# Altium PCB Motor-42-Test.PcbDoc
Units mm, origin at the board's own origin, x right, y up, seen from the top; angles counter-clockwise.
Board outline 42 x 42 mm, 2 copper layers (Top Layer, Bottom Layer); 33 components, 20 nets, 186 pads, 95 vias.
Unrouted connection lines stored in the file: 33.
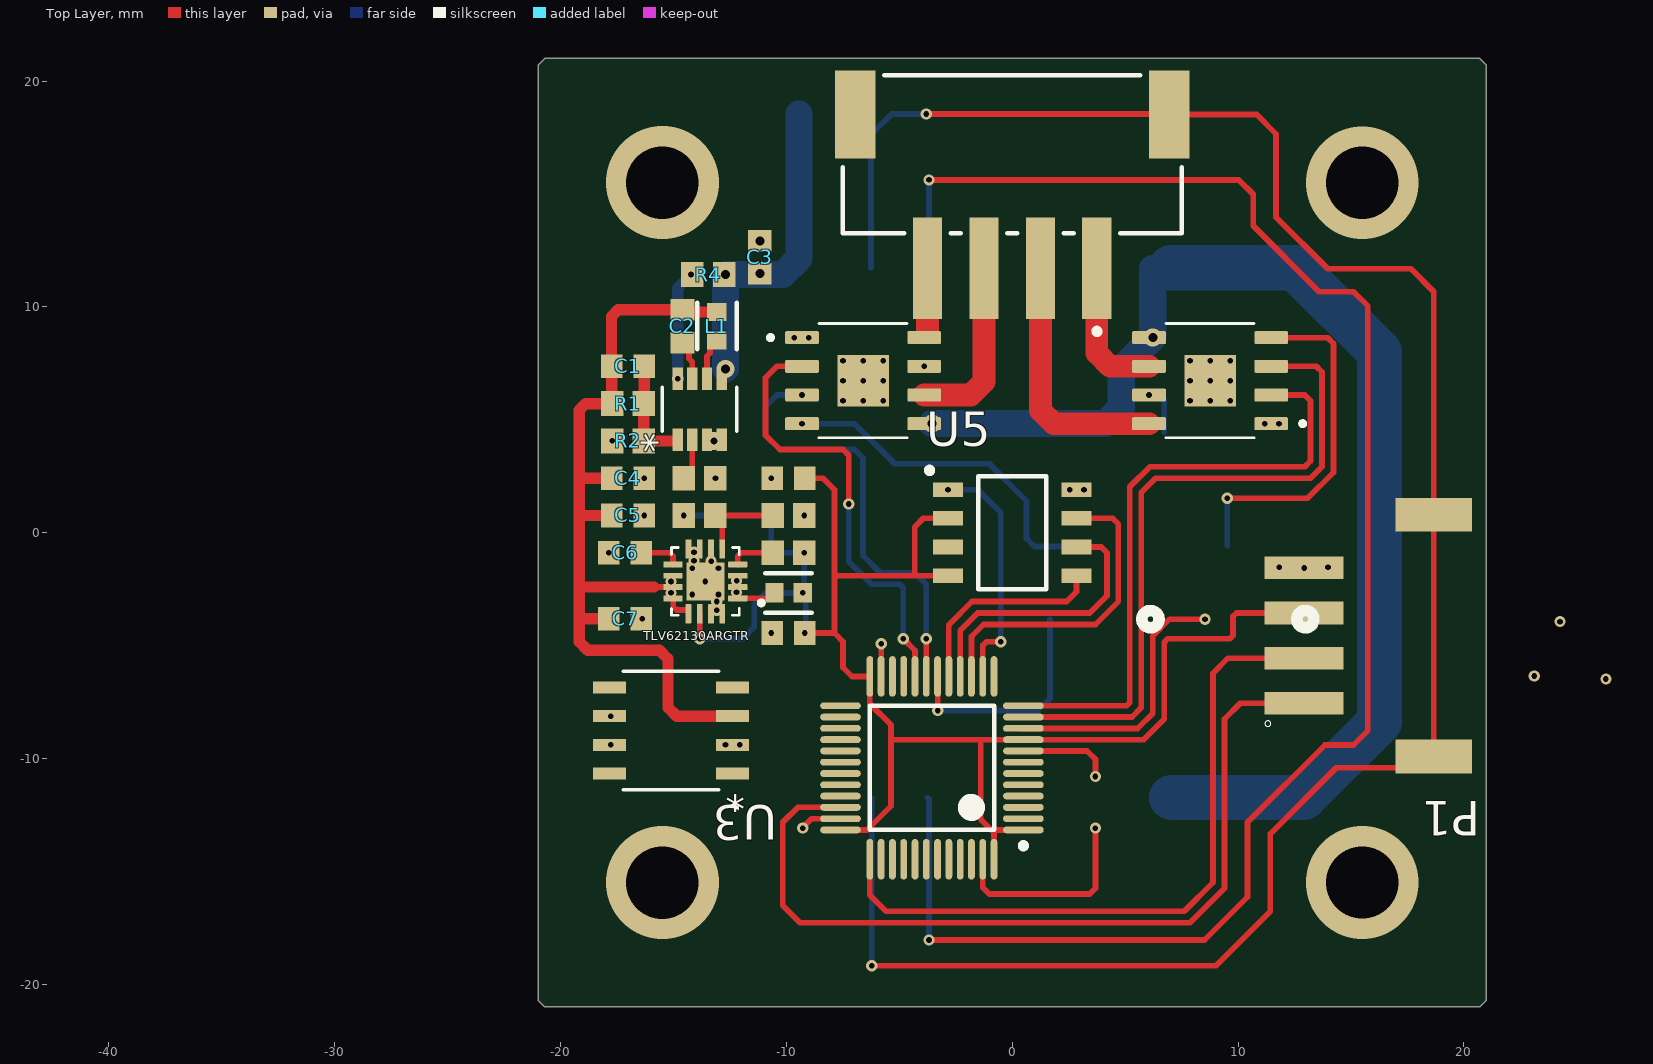
[diagram p0: Top Layer view]
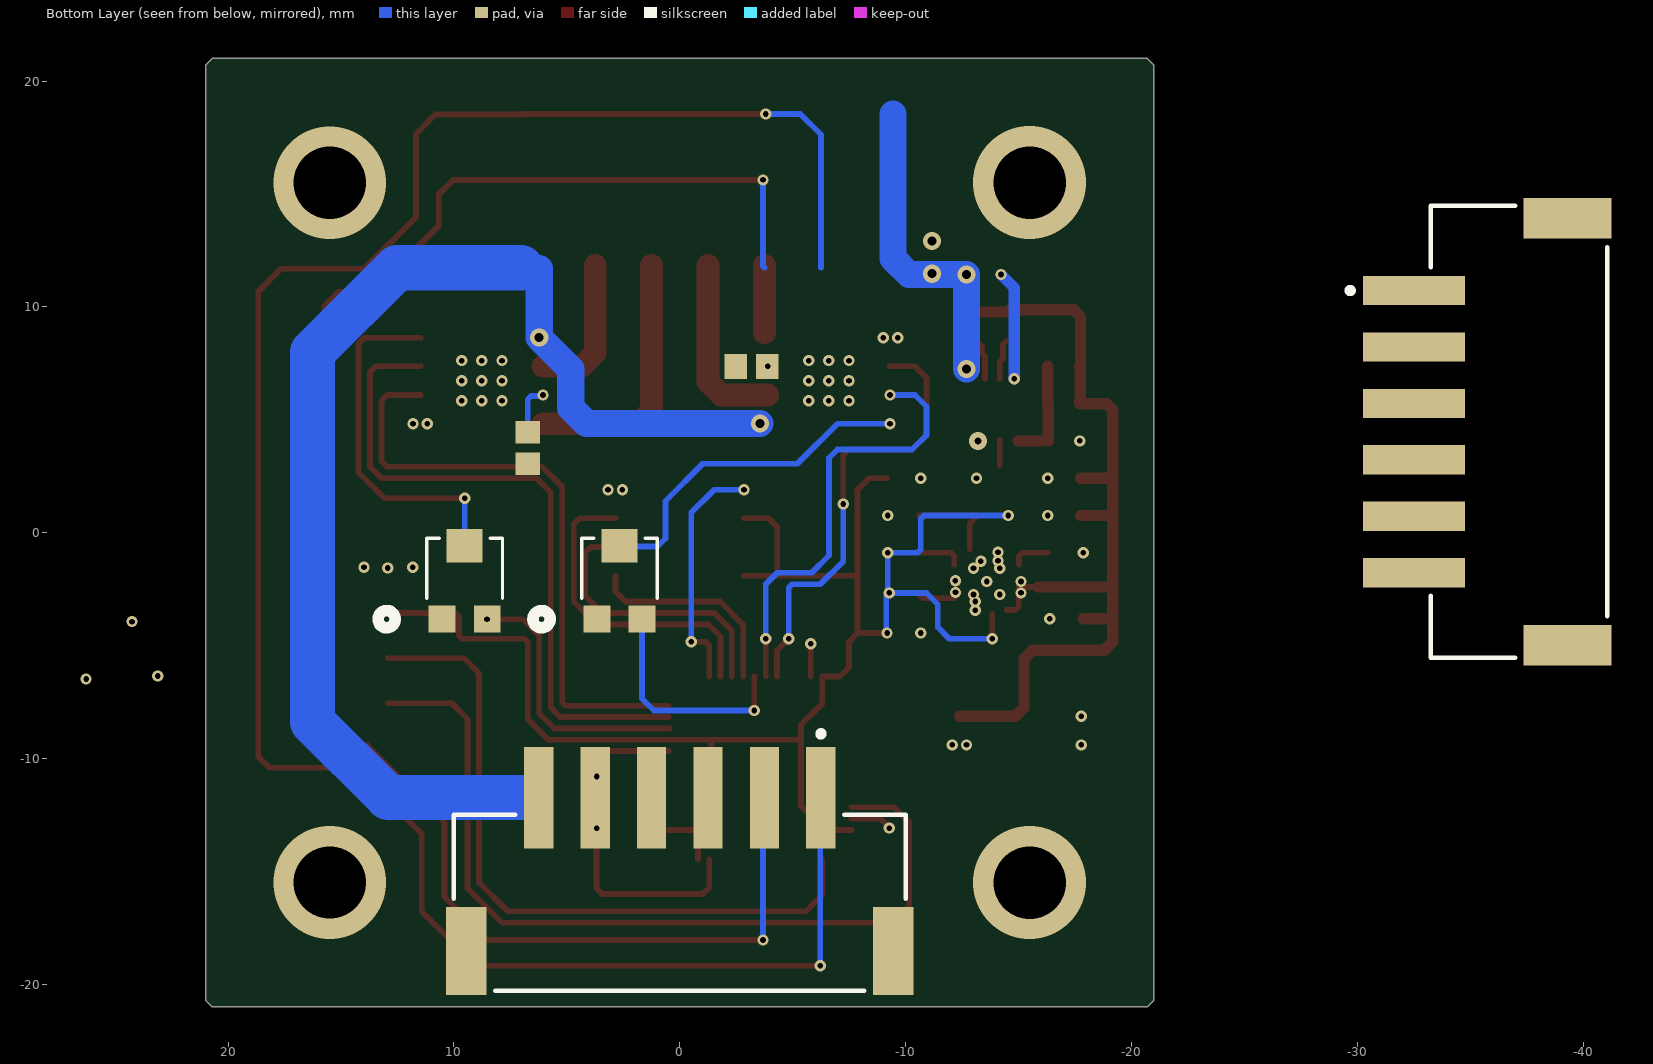
[diagram p1: Bottom Layer view, seen from below]

## Layer stack, top to bottom
Top Solder: solder mask 0.0102, Solder Resist, Dk 3.5
Top Layer: signal copper 0.0356
Dielectric 1: dielectric 0.32, FR-4, Dk 4.8
Bottom Layer: signal copper 0.0356
Bottom Solder: solder mask 0.0102, Solder Resist, Dk 3.5

## Board outline
-21,-20.701 -20.701,-21 20.701,-21 21,-20.701 21,20.701 20.701,21 -20.701,21 -21,20.701

## Design rules (kind name [scope] priority, off if disabled: settings)
Clearance [All] p1: gap=0.1 ignorepadtopadclearanceinfootprint=TRUE
Clearance Clearance_net [InNetClass('All Nets') vs InNetClass('All Nets')] p2: gap=0.01 ignorepadtopadclearanceinfootprint=FALSE
PolygonConnect [All] p1: connectstyle=Relief reliefconductorwidth=0.254 reliefentries=4 polygonreliefangle="90 Angle" airgapwidth=0.254
RoutingVias [All] p1: holewidth=0.711 width=1.27 viastyle="Through Hole" minholewidth=0.1 minwidth=0.1 maxholewidth=5 maxwidth=5
SolderMaskExpansion [All] p1: expansion=0.102 istentingtop=FALSE
Width [All] p1: maxlimit=3 minlimit=0.254 preferedwidth=0.254
30 further rules are at their usual default settings.

## Classes and differential pairs
component class Motor-42-ClosedLoop: C1 C2 C6 P1 R1 R2 R4 U3 U5

## Components (designator, comment, footprint, x,y, rotation, side; value= is the part's Value field where it differs from the comment)
C1 "12pF" CAPC1608X90X35ML10T15 -17.018,7.366 r180 top
C2 "10nF" CAPC1608X90X35ML10T15 -14.605,9.144 r90 top
C3 "100uF" CAPC1608X90X35ML10T15 -11.176,12.192 r270 top
C4 "100uF" CAPC1608X90X35ML10T15 -17.018,2.413 r180 top
C5 "22uF" CAPC1608X90X35ML10T15 -9.906,2.413 r0 top
C5 "22uF" CAPC1608X90X35ML10T15 -9.906,-4.445 r0 top
C5 "10uF" CAPC1608X90X35ML10T15 -17.018,0.762 r180 top (schematic designator C3)
C6 "3.3nF" CAPC1608X90X35ML10T15 -17.145,-0.889 r0 top (schematic designator C4)
C7 "10uF" CAPC1608X90X35ML10T15 -17.145,-3.81 r180 top (schematic designator C3)
L1 "Comment" FP-LQG18HH_00-IPC_C -13.081,9.144 r90 top
P1 "S4B-PH-SM4-TB" JST_S4B-PH-SM4-TB 12.919,-4.556 r270 top
R1 "110K" RESC1608X55X30ML20T20 -17.018,5.715 r180 top
R2 "15K" RESC1608X55X30ML20T20 -17.018,4.064 r0 top
R3 "47K" RESC1608X55X30ML20T20 -13.843,2.413 r180 top
R4 "47K" RESC1608X55X30ML20T20 -13.462,11.43 r0 top
R5 "100K" RESC1608X55X30ML20T20 -9.906,-0.889 r180 top
R6 "750K" RESC1608X55X30ML20T20 -13.843,0.762 r0 top
R7 "240K" RESC1608X55X30ML20T20 -3.175,7.366 r0 bottom
R7 "240K" RESC1608X55X30ML20T20 6.731,3.748 r90 bottom
R7 "240K" RESC1608X55X30ML20T20 -9.906,0.762 r180 top
TLV62130ARGTR "Comment" QFN50P300X300X100-17N -13.589,-2.159 r180 top
U3 "TJA1051T31J" SO8_SOT96-1_NXP -15.113,-8.763 r180 top
U5 "MT6816" SOIC127P600X175-8N-8-V 0,0 r0 top
? "Comment" EVM-3ESX50B14_PAN 2.667,-2.286 r180 bottom
? "Comment" EVM-3ESX50B14_PAN 9.525,-2.286 r180 bottom
? "Comment" FP-S6B-XH-SM4-TB_LF_SN-MFG -37.162,4.472 r90 bottom
? "Comment" FP-S6B-XH-SM4-TB_LF_SN-MFG 0,-16.383 r180 bottom
? "Comment" SOIC127P599X175-9N 8.763,6.731 r180 top
? "Comment" SOIC127P599X175-9N -6.604,6.731 r0 top
? "Comment" FP-LQG18HH_00-IPC_C -9.906,-2.667 r0 top
? "Comment" FP-S4B-XH-SM4-TB_LF_SN-MFG 0,16.764 r180 top
? "Comment" LQFP48_N -3.556,-10.414 r180 top
? "Comment" TSOT_303AIC_SGY -13.843,5.461 r90 top

## Footprints (in the part's own frame and the unit in brackets; to place one, negate y for a bottom-side part, rotate by r counter-clockwise, add the part's x,y. Pads: shape width x height; smd on the part's side, far side on the other; paste and mask are expansions set on the pad)
CAPC1608X90X35ML10T15 [mm] "Chip Capacitor, 2-Leads, Body 1.60x0.80mm, IPC Low Density"
  rect 0.95x1.05 smd: 1(-0.725,0) 2(0.725,0)
  body extent -0.85,-0.45 0.85,0.45, height 0.9
EVM-3ESX50B14_PAN [mil]
  rect 47x47 smd paste+0 mask+0: 1(-39.38,-60.75) 3(39.37,-60.75)
  rect 63x59 smd paste-31.5 mask-31.5: 2(0,67.25)
  silkscreen extent -151,-76 66,80
FP-LQG18HH_00-IPC_C [mm]
  rect 0.806x0.858 smd paste+0 mask+0: 1(-0.626,0) 2(0.626,0)
  silkscreen extent -1.03,-0.87 1.03,0.87, body extent -1.13,-0.58 1.13,0.58, height 0.25
FP-S4B-XH-SM4-TB_LF_SN-MFG [mm]
  rect 1.3x4.5 smd paste+0 mask+0: 1(-3.75,5.05) 2(-1.25,5.05) 3(1.25,5.05) 4(3.75,5.05)
  rect 1.8x3.9 smd paste+0 mask+0: 5(-6.95,-1.75) 6(6.95,-1.75)
  silkscreen extent -7.5,-3.5 7.5,7.97, body extent -7.95,-3.8 7.95,7.4, height 0.25
FP-S6B-XH-SM4-TB_LF_SN-MFG [mm]
  rect 1.3x4.5 smd paste+0 mask+0: 1(6.25,4.65) 2(3.75,4.65) 3(1.25,4.65) 4(-1.25,4.65) 5(-3.75,4.65) 6(-6.25,4.65)
  rect 1.8x3.9 smd paste+0 mask+0: 7(-9.45,-2.15) 8(9.45,-2.15)
  silkscreen extent -10,-3.9 10,7.6, body extent -9.97,-3.9 9.97,6.1, height 6
JST_S4B-PH-SM4-TB [mm]
  rect 1x3.5 smd: 1(3,0) 2(1,0) 3(-1,0) 4(-3,0)
  rect 1.5x3.4 smd: P1(5.35,5.75) P2(-5.35,5.75)
  silkscreen extent 3.77,-1.73 4.03,-1.47
LQFP48_N [mm] "Thin QFP, 48-Leads, Body 7x7mm, Pitch 0.5mm, IPC Medium Density"
  oval 1.8x0.3 smd: 1(-4.05,2.75) 2(-4.05,2.25) 3(-4.05,1.75) 4(-4.05,1.25) 5(-4.05,0.75) 6(-4.05,0.25) 7(-4.05,-0.25) 8(-4.05,-0.75) 9(-4.05,-1.25) 10(-4.05,-1.75) 11(-4.05,-2.25) 12(-4.05,-2.75) 25(4.05,-2.75) 26(4.05,-2.25) 27(4.05,-1.75) 28(4.05,-1.25) 29(4.05,-0.75) 30(4.05,-0.25) 31(4.05,0.25) 32(4.05,0.75) 33(4.05,1.25) 34(4.05,1.75) 35(4.05,2.25) 36(4.05,2.75)
  oval 0.3x1.8 smd: 13(-2.75,-4.05) 14(-2.25,-4.05) 15(-1.75,-4.05) 16(-1.25,-4.05) 17(-0.75,-4.05) 18(-0.25,-4.05) 19(0.25,-4.05) 20(0.75,-4.05) 21(1.25,-4.05) 22(1.75,-4.05) 23(2.25,-4.05) 24(2.75,-4.05) 37(2.75,4.05) 38(2.25,4.05) 39(1.75,4.05) 40(1.25,4.05) 41(0.75,4.05) 42(0.25,4.05) 43(-0.25,4.05) 44(-0.75,4.05) 45(-1.25,4.05) 46(-1.75,4.05) 47(-2.25,4.05) 48(-2.75,4.05)
  silkscreen extent -4.18,-2.75 2.75,3.57, body extent -3.5,-3.5 3.5,3.5, height 1.6
QFN50P300X300X100-17N [mm]
  rrect25% 0.86x0.26 smd: 1(-1.435,0.75) 2(-1.435,0.25) 3(-1.435,-0.25) 4(-1.435,-0.75) 9(1.435,-0.75) 10(1.435,-0.25) 11(1.435,0.25) 12(1.435,0.75)
  rrect25% 0.26x0.86 smd: 5(-0.75,-1.435) 6(-0.25,-1.435) 7(0.25,-1.435) 8(0.75,-1.435) 13(0.75,1.435) 14(0.25,1.435) 15(-0.25,1.435) 16(-0.75,1.435)
  rect 1.68x1.68 smd paste-0.31: 17(0,0)
  round 0.4 hole 0.2 mask+0: 18(0,0) 19(-0.58,0.58) 20(0.58,0.58) 21(-0.58,-0.58) 22(0.58,-0.58)
  silkscreen extent -2.57,-1.5 1.5,1.5, body extent -1.5,-1.5 1.5,1.5, height 1
RESC1608X55X30ML20T20 [mm] "Chip Resistor, 2-Leads, Body 1.60x0.80mm, IPC Low Density"
  rect 1x1.1 smd: 1(-0.7,0) 2(0.7,0)
  body extent -0.9,-0.5 0.9,0.5, height 0.55
SO8_SOT96-1_NXP [mil]
  rect 57.5x21 smd paste+0 mask+0: 1(-107.25,75) 2(-107.25,25) 3(-107.25,-25) 4(-107.25,-75) 5(107.25,-75) 6(107.25,-25) 7(107.25,25) 8(107.25,75)
  silkscreen extent -84,-104 84,104, body extent -122,-99 122,99, height 69
SOIC127P599X175-9N [mm]
  rrect25% 1.5x0.58 smd: 1(-2.705,1.905) 2(-2.705,0.635) 3(-2.705,-0.635) 4(-2.705,-1.905) 5(2.705,-1.905) 6(2.705,-0.635) 7(2.705,0.635) 8(2.705,1.905)
  rect 2.285x2.285 smd paste-2: 9(0,0)
  silkscreen extent -4.2,-2.52 1.95,2.52, body extent -3,-2.45 3,2.45, height 1.75
SOIC127P600X175-8N-8-V [mm]
  rect 1.31x0.65 smd: 1(-2.845,1.905) 2(-2.845,0.635) 3(-2.845,-0.635) 4(-2.845,-1.905) 5(2.845,-1.905) 6(2.845,-0.635) 7(2.845,0.635) 8(2.845,1.905)
  silkscreen extent -3.78,-2.5 1.5,2.88, body extent -3,-2.5 3,2.5, height 1.75
TSOT_303AIC_SGY [mil]
  rect 39.5x18 smd paste+0 mask+0: 1(-53.25,38.39) 2(-53.25,12.8) 3(-53.25,-12.8) 4(-53.25,-38.39) 5(53.25,-38.39) 7(53.25,12.8) 8(53.25,38.39)
  rect 39.5x18 smd paste+0: 6(53.25,-12.8)
  silkscreen extent -39,-65 39,65, body extent -59,-60 59,60, height 43

## Part data
C1 C2 C3 C4 C5 C5 C5 C6 C7: library part CMP-2006-02924-1, Manufacturer=Murata, PART NUMBER=GRM188R71H472KA01D
P1: "Connector Header Surface Mount, Right Angle 4 position 0.079 _2.00mm_", Package=None, Availability=Unavailable, MF="JST Sales", MP=S4B-PH-SM4-TB, Price=None, SnapEDA_Link=https://www.snapeda.com/parts/S4B-PH-SM4-TB/JST%20Sales%20America%20Inc./view-part/473686/?ref=snap
R1 R2 R3 R4 R5 R6 R7 R7 R7: library part CMP-2000-00054-1, Manufacturer=Panasonic, PART NUMBER=ERA3AEB392V
U3: "No Description Available", Mfr_Name=NXP, RefDes=RefDes, Type=Type
U5: library part TLE5012B_E1000, "TLE5012B/TLI5012B Angular and Linear Position Sensor Evaluation Board Automotive", Package="SOIC-8 Infineon Technologies", Availability="In Stock", Check_prices=https://www.snapeda.com/parts/TLE5012B%20E1000/Infineon+Technologies/view-part/?ref=eda, MF="Infineon Technologies", MP="TLE5012B E1000", Price=None, SnapEDA_Link=https://www.snapeda.com/parts/TLE5012B%20E1000/Infineon+Technologies/view-part/?ref=snap

## Via types
v1: diameter 0.5, hole 0.25, Top Layer to Bottom Layer, 84 vias
v2: diameter 0.8, hole 0.4, Top Layer to Bottom Layer, 6 vias
v3: diameter 5, hole 3.2, Top Layer to Bottom Layer, 4 vias
v4: diameter 0.8, hole 0.3, Top Layer to Bottom Layer, 1 vias

## Nets (pads, with @x,y where several pads share a name; then routed paths per layer and width w, separated by ;. In a path a pad name is that pad's centre, name@x,y a point inside that pad or via, vN(x,y) a via of type N, cw(c..) or ccw(c..) an arc to the next point about the centre after c; other vN are vias at no path point)
CANH: ?.2@-3.75,-11.733 ?.5@-32.512,0.722 U3.7 | length 76.8
  Top Layer w0.254: v1(-3.683,-18.034) 8.509,-18.034 10.414,-16.129 10.414,-12.827 13.843,-9.398 15.113,-9.398 15.748,-8.763 15.748,10.033 15.113,10.668 13.589,10.668 10.668,13.589 10.668,14.986 10.033,15.621 v1(-3.683,15.621)
  Bottom Layer w0.254: ?.2@-3.75,-11.733 -3.683,-11.8 v1(-3.683,-18.034) ; -3.75,11.733 -3.683,11.8 v1(-3.683,15.621)
  other v1: -17.78,-9.398
CANL: ?.1@-6.25,-11.733 ?.5@6.95,18.514 ?.6@-32.512,-1.778 P1.P1 P1.P2 U3.6 | length 95.4
  Top Layer w0.254: v1(-6.223,-19.177) 9.017,-19.177 11.43,-16.764 11.43,-13.335 14.351,-10.414 18.161,-10.414 P1.P1 18.669,10.668 17.653,11.684 13.97,11.684 11.684,13.97 11.684,17.653 10.823,18.514 6.95,18.514 6.922,18.542 v1(-3.81,18.542)
  Bottom Layer w0.254: ?.1@-6.25,-11.733 -6.223,-11.76 v1(-6.223,-19.177) ; -6.25,11.733 -6.25,17.626 -5.334,18.542 v1(-3.81,18.542)
  other v1: -17.78,-8.128
GND: ?.1@3.667,-3.829 ?.1@10.525,-3.829 ?.1@11.468,4.826 ?.1@-9.309,8.636 ?.2@-32.512,8.222 ?.3@-13.518,4.108 ?.4@-12.868,4.108 ?.5@3.75,-11.733 ?.8@0.494,-9.664 ?.9@8.763,6.731 ?.9@-6.604,6.731 ?.23 ?.35 ?.47 C3.1 C4.1 C5.1 C6.1 C7.1 P1.4 R2.1 R3.1 R7.1@6.731,3.048 R7.1@-9.206,0.762 R7.2@-2.475,7.366 TLV62130ARGTR.6 TLV62130ARGTR.7 TLV62130ARGTR.8 TLV62130ARGTR.15 TLV62130ARGTR.16 TLV62130ARGTR.17 TLV62130ARGTR.18 TLV62130ARGTR.19 TLV62130ARGTR.20 TLV62130ARGTR.21 TLV62130ARGTR.22 U3.2 U5.8 | length 16.5
  Top Layer w0.254: v1(-9.271,-13.081) -9.271,-13.048 -8.887,-12.664 ?.35 ; ?.23 v1(-5.806,-4.917) ; ?.47 -1.306,-15.712 -1.016,-16.002 3.429,-16.002 3.683,-15.748 v1(3.683,-13.081) ; ?.8@0.494,-9.664 3.314,-9.664 3.683,-10.033 v1(3.683,-10.795)
  other v1: -12.7,-9.398 -12.065,-9.398 -10.668,-4.445 -16.383,-3.81 -13.081,-3.429 -13.081,-3.048 -14.169,-2.739 -13.009,-2.739 -13.589,-2.159 -14.169,-1.579 -13.009,-1.579 12.929,-1.565 11.821,-1.533 13.98,-1.533 -13.335,-1.27 -14.091,-1.244 -17.87,-0.889 -14.091,-0.863 -16.293,0.762 -9.206,0.762 2.54,1.905 3.175,1.905 -16.293,2.413 -13.143,2.413 -10.668,2.413 -17.718,4.064 11.176,4.826 11.811,4.826 -7.493,5.842 -6.604,5.842 -5.715,5.842 7.874,5.842 8.763,5.842 9.652,5.842 -7.493,6.731 -6.604,6.731 -5.715,6.731 7.874,6.731 8.763,6.731 9.652,6.731 -7.493,7.62 -6.604,7.62 -5.715,7.62 7.874,7.62 8.763,7.62 9.652,7.62 -9.652,8.636 -9.017,8.636
  other v2: -11.176,12.917
  other v4: -13.208,4.064
NetC1_1: ?.1@-14.818,4.108 C1.1 R1.1 R2.2 | length 4.4
  Top Layer w0.5: R2.2 R1.1 ; R1.1@-16.293,5.74 C1.1 ; R2.2@-16.129,4.064 ?.1@-14.986,4.064
NetC2_1: ?.7@-14.168,6.814 C2.1 | length 1.8
  Top Layer w0.254: C2.1@-14.443,8.474 -14.316,8.347 -14.316,7.712 -14.168,7.564 ?.7@-14.168,6.814
NetC4_2: C6.2 TLV62130ARGTR.9 | length 1.7
  Top Layer w0.254: C6.2@-16.293,-0.889 -15.173,-0.889 -15.024,-1.038 TLV62130ARGTR.9
NetL1_1: ?.6@-13.518,6.814 L1.1 | length 1.9
  Top Layer w0.254: ?.6@-13.518,6.814 -13.518,7.818 -13.381,7.955 -13.381,8.242 -13.105,8.518 L1.1
NetL2_1: ?.1@-10.532,-2.667 TLV62130ARGTR.1 TLV62130ARGTR.2 TLV62130ARGTR.3 | length 1.7
  Top Layer w0.254: TLV62130ARGTR.1 -10.774,-2.909 ?.1@-10.532,-2.667
  other v1: -12.212,-2.646 -12.206,-2.129
NetP1_2: ?.37 P1.2 | length 31.2
  Top Layer w0.254: ?.37 -6.306,-16.046 -5.588,-16.764 7.62,-16.764 8.89,-15.494 8.89,-6.223 9.557,-5.556 P1.2
NetP1_3: ?.34 P1.1 | length 38.3
  Top Layer w0.254: ?.34 -9.497,-12.164 -10.16,-12.827 -10.16,-16.51 -9.398,-17.272 7.874,-17.272 9.398,-15.748 9.398,-8.255 10.097,-7.556 P1.1
NetR3_2: ?.2@-14.168,4.108 R3.2 | length 1.1
  Top Layer w0.254: -14.168,2.992 ?.2@-14.168,4.108
NetR4_1: ?.8@-14.818,6.814 R4.1 | length 4.9
  Bottom Layer w0.5: v1(-14.818,6.814) -14.818,10.836 v1(-14.224,11.43)
NetR5_2: R5.2 TLV62130ARGTR.4 | length 2
  Top Layer w0.254: TLV62130ARGTR.4 -12.154,-1.038 -12.005,-0.889 R5.2
NetR6_2: R6.2 R7.2@-10.606,0.762 TLV62130ARGTR.5 | length 4.1
  Top Layer w0.254: R6.2@-13.143,0.712 -12.839,0.408 TLV62130ARGTR.5 ; R6.2 R7.2@-10.606,0.762
NetU3_1: U3.1
NetU3_4: U3.4
NetU3_8: U3.8
VCC_3V3: ?.1@0.494,-13.164 ?.2@-9.28,-2.667 ?.9@0.494,-9.164 ?.24 ?.36 ?.48 C5.2@-9.181,2.413 C5.2@-9.181,-4.445 P1.3 R5.1 R6.1 TLV62130ARGTR.14 U5.2 U5.4 | length 77.3
  Top Layer w0.254: v1(-13.843,-4.699) -13.839,-4.695 TLV62130ARGTR.14 ; v1(-9.181,-4.445) -7.874,-4.445 ; C5.2@-9.181,2.413 -8.382,2.413 -7.874,1.905 -7.874,-1.905 ; ?.36 -6.433,-13.164 -5.373,-12.104 -5.373,-9.144 ; -4.318,-1.778 -4.318,0.254 -3.937,0.635 U5.2 ; U5.4 -7.874,-1.905 ; ?.48 -0.806,-13.208 -0.762,-13.164 ; ?.1@0.494,-13.164 -0.762,-13.164 ; P1.3 9.928,-3.556 9.779,-3.705 9.779,-4.55 9.63,-4.699 6.88,-4.699 6.731,-4.848 6.731,-8.255 5.822,-9.164 0.494,-9.164 -1.397,-9.164 ; -7.874,-4.445 -7.874,-1.905 ; -7.874,-4.445 -7.493,-4.826 -7.493,-5.969 -7.098,-6.364 ?.24 -6.306,-7.576 -5.373,-8.509 -5.373,-9.144 ; -5.373,-9.144 -5.353,-9.164 -1.397,-9.164 ; -1.397,-9.164 -1.397,-12.7 -0.933,-13.164 -0.762,-13.164
  Bottom Layer w0.254: v1(-14.543,0.762) -10.817,0.762 -10.668,0.613 -10.668,-0.74 -10.519,-0.889 v1(-9.206,-0.889) -9.206,-2.593 v1(-9.28,-2.667) ; v1(-13.843,-4.699) -11.938,-4.699 -11.43,-4.191 -11.43,-3.175 -10.922,-2.667 v1(-9.28,-2.667) ; v1(-9.181,-4.445) -9.144,-4.408 -9.144,-2.803 v1(-9.28,-2.667)
VCC_5V: C1.2 C2.2 C4.2 C5.2@-17.743,0.762 C7.2 L1.2 R1.2 TLV62130ARGTR.10 TLV62130ARGTR.11 TLV62130ARGTR.12 TLV62130ARGTR.13 U3.3 | length 38.5
  Top Layer w0.254: -15.871,-2.409 TLV62130ARGTR.11 ; TLV62130ARGTR.12@-15.017,-2.912 -15.017,-3.271 -14.859,-3.429 -14.478,-3.429
  Top Layer w0.5: -19.136,0.762 C5.2@-17.743,0.762 ; -18.923,-3.81 C7.2 ; -18.884,-2.409 -15.871,-2.409 ; C4.2 -19.177,2.413 ; C1.2 -17.743,9.576 -17.45,9.869 C2.2 -14.506,9.77 L1.2 ; R1.2 -18.884,5.715 -19.177,5.422 -19.177,2.413 ; R1.2@-17.718,5.842 -17.73,5.854 -17.73,7.328 C1.2@-17.718,7.341 ; U3.3 -14.859,-8.128 -15.24,-7.747 -15.24,-5.588 -15.621,-5.207 -18.796,-5.207 -19.177,-4.826 -19.177,-2.116 -19.177,2.413
  other v1: -15.113,-2.667 -15.113,-2.159
VCC_24V: ?.1@-32.512,10.722 ?.5@6.058,8.636 ?.5@-3.899,4.826 ?.5@-12.868,6.814 ?.6@6.25,-11.733 ?.7@-39.312,-4.978 C3.2 R4.2 | length 67.3
  Bottom Layer w1.2: v2(-12.7,7.239) v2(-12.7,11.43) -10.153,11.43 -9.45,12.133 -9.45,18.533 ; v2(-3.556,4.826) 4.123,4.826 4.826,5.529 4.826,7.239 v2(6.223,8.636) 6.223,11.706
  Bottom Layer w2: 7.034,11.733 12.524,11.733 16.256,8.001 16.256,-8.382 12.905,-11.733 7.063,-11.733
  other v2: -11.176,11.467
pads on no net: ?.1@3.75,11.714 ?.2@0.494,-12.664 ?.2@1.25,11.714 ?.2@2.667,-0.578 ?.2@9.525,-0.578 ?.2@11.468,6.096 ?.2@-9.309,7.366 ?.3@0.494,-12.164 ?.3@1.667,-3.829 ?.3@8.525,-3.829 ?.3@11.468,7.366 ?.3@-1.25,11.714 ?.3@-1.25,-11.733 ?.3@-9.309,6.096 ?.3@-32.512,5.722 ?.4@0.494,-11.664 ?.4@1.25,-11.733 ?.4@11.468,8.636 ?.4@-3.75,11.714 ?.4@-9.309,4.826 ?.4@-32.512,3.222 ?.5@0.494,-11.164 ?.6@0.494,-10.664 ?.6@6.058,7.366 ?.6@-3.899,6.096 ?.6@-6.95,18.514 ?.7@0.494,-10.164 ?.7@6.058,6.096 ?.7@9.45,-18.533 ?.7@-3.899,7.366 ?.8@6.058,4.826 ?.8@-3.899,8.636 ?.8@-9.45,-18.533 ?.8@-39.312,13.922 ?.10 ?.11 ?.12 ?.13 ?.14 ?.15 ?.16 ?.17 ?.18 ?.19 ?.20 ?.21 ?.22 ?.25 ?.26 ?.27 ?.28 ?.29 ?.30 ?.31 ?.32 ?.33 ?.38 ?.39 ?.40 ?.41 ?.42 ?.43 ?.44 ?.45 ?.46 R7.1@-3.875,7.366 R7.2@6.731,4.448 U3.5 U5.1 U5.3 U5.5 U5.6 U5.7
copper on no net: | length 228.3
  Top Layer w0.254: -9.309,7.366 -10.414,7.366 -10.922,6.858 -10.922,4.318 -10.287,3.683 -7.493,3.683 -7.239,3.429 v1(-7.239,1.27) ; v1(-4.826,-4.699) -4.306,-5.219 -4.306,-6.364 ; v1(-3.81,-4.699) -3.808,-4.701 -3.808,-6.358 -3.806,-6.36 ; -3.306,-6.364 -3.304,-6.366 -3.304,-7.872 v1(-3.302,-7.874) ; -2.806,-6.364 -2.806,-4.076 -1.778,-3.048 2.413,-3.048 2.845,-2.616 2.845,-1.905 ; -2.306,-6.364 -2.306,-4.338 -1.524,-3.556 3.429,-3.556 4.191,-2.794 4.191,-0.889 3.937,-0.635 2.845,-0.635 ; -1.806,-6.364 -1.806,-4.6 -1.27,-4.064 3.683,-4.064 4.699,-3.048 4.699,0.381 4.445,0.635 2.845,0.635 ; -1.306,-6.364 -1.306,-4.989 -1.266,-4.949 -1.143,-4.826 v1(-0.508,-4.826) ; 0.444,-8.673 5.551,-8.673 6.223,-8.001 6.223,-4.572 6.966,-3.829 v1@8.525,-3.829 ; 0.494,-8.164 5.298,-8.164 5.715,-7.747 5.715,1.778 6.35,2.413 13.208,2.413 13.716,2.921 13.716,7.112 13.462,7.366 11.468,7.366 ; 0.494,-7.664 5.058,-7.664 5.207,-7.515 5.207,2.032 6.096,2.921 12.954,2.921 13.208,3.175 13.208,5.842 12.954,6.096 11.468,6.096 ; v1(9.525,1.524) 13.081,1.524 14.224,2.667 14.224,8.382 13.97,8.636 11.468,8.636
  Top Layer w1: -3.899,6.096 -1.836,6.096 -1.25,6.682 -1.25,11.841 ; -3.751,8.846 -3.751,11.84 -3.75,11.841 ; 1.25,11.841 1.25,5.412 1.836,4.826 6.058,4.826 ; 3.75,11.841 3.75,7.952 4.336,7.366 6.058,7.366
  Bottom Layer w0.254: v1(-9.309,4.826) -6.985,4.826 -5.207,3.048 -1.016,3.048 0.635,1.397 0.635,-0.254 0.991,-0.61 2.667,-0.61 ; v1(-9.309,6.096) -10.414,6.096 -10.922,5.588 -10.922,4.318 -10.287,3.683 -6.985,3.683 -6.604,3.302 -6.604,-1.016 -5.842,-1.778 -4.318,-1.778 -3.812,-2.284 -3.81,-2.286 -3.81,-3.713 v1(-3.81,-4.699) ; v1(-7.239,1.27) -7.239,-1.27 -6.223,-2.286 -4.975,-2.286 -4.826,-2.435 v1(-4.826,-4.699) ; v1(-3.302,-7.874) 1.143,-7.874 1.667,-7.35 1.667,-3.829 ; v1(-2.845,1.905) -1.524,1.905 -0.508,0.889 v1(-0.508,-4.826) ; v1(6.058,6.096) 6.105,6.049 6.582,6.049 6.731,5.9 6.731,4.448 ; 9.525,-0.578 v1(9.525,1.524)
  other v1: 26.289,-6.477 23.114,-6.35 24.257,-3.937 8.535,-3.838 -3.899,7.366
  other v3: -15.494,-15.5 15.5,-15.494 -15.494,15.5 15.5,15.494

## Text inside footprints (layer, text, board x,y; h text height)
U3: Top Overlay "*" at -11.817,-11.074 h1.27 r180; Mechanical 13 "*" at -13.183,-9.919 h1.27 r180
?: Top Overlay "*" at -15.148,3.537 h1.27 r90; Mechanical 13 "*" at -14.021,4.674 h1.27 r90